# EAGLE board aurdino 17 (EAGLE 9.7.0)

Size 171.56 x 59.69 mm. Coordinates in mm from the lower left corner, seen from the top.
Outline: 0,0 171.56,0 171.56,59.69 0,59.69 0,0
Copper layers (1*16): Top 0.035mm / dielectric 1.5mm / Bottom 0.035mm
Design rules "default": minimum track width 6mil, minimum drill 0.35mm, track to track 6mil, track to pad 6mil, pad to pad 6mil, via to via 6mil, smd to smd 6mil, copper to edge 40mil, drill to drill 6mil, minimum pad ring 10mil, minimum via ring 8mil, stop-mask expansion 4mil, vias tented up to drill 0mil, thermal gap 10mil

## Footprints (pad centres in the part's own frame; a part is rotated, then mirrored left to right if it is on the bottom)
LEDRD254W60D565H860B = drill 0.981 pad 1.581: 1 -1.27,0; 2 1.27,0
LEDRD254W60D565H860B_Y = drill 0.981 pad 1.581: 1 -1.27,0; 2 1.27,0
LEDRD254W60D565H860B_G = drill 0.981 pad 1.581: 1 -1.27,0; 2 1.27,0
RESAD1016W63L850D250B = drill 0.83 pad 1.43: 1 -5.08,0; 2 5.08,0
HA-06-SM065 = drill 1 pad 1.676: 1 -2.54,-2.54; 2 0,2.54; 3 2.54,-2.54
ARDUINO-UNO-R3-SHIELD = drill 1.016 pad 1.88: 3.3V 24.13,-2.54; 5V 24.13,0; A0 24.13,12.7; A1 24.13,15.24; A2 24.13,17.78; A3 24.13,20.32; A4 24.13,22.86; A5 24.13,25.4; AREF -24.13,-13.97; D2 -24.13,20.32; D3 -24.13,17.78; D4 -24.13,15.24; D5 -24.13,12.7; D6 -24.13,10.16; D7 -24.13,7.62; D8 -24.13,3.81; D9 -24.13,1.27; D10 -24.13,-1.27; D11 -24.13,-3.81; D12 -24.13,-6.35; D13 -24.13,-8.89; GND@0 24.13,2.54; GND@1 24.13,5.08; GND@2 -24.13,-11.43; IOREF 24.13,-7.62; NC 24.13,-10.16; RES 24.13,-5.08; RX -24.13,25.4; SCL -24.13,-19.05; SDA -24.13,-16.51; TX -24.13,22.86; VIN 24.13,7.62

## Placement (x,y rotation side)
D6  RED  [LEDRD254W60D565H860B]  130.22,46.43 180 top
D7  YELLOW  [LEDRD254W60D565H860B_Y]  135.3,46.43 180 top
D8  YELLOW  [LEDRD254W60D565H860B_Y]  140.38,46.43 180 top
D9  GREEN  [LEDRD254W60D565H860B_G]  145.46,46.43 180 top
D10  GREEN  [LEDRD254W60D565H860B_G]  150.54,46.43 180 top
R6  450  [RESAD1016W63L850D250B]  151.81,31.19 90 top
R7  450  [RESAD1016W63L850D250B]  146.73,31.19 90 top
R8  450  [RESAD1016W63L850D250B]  141.65,31.19 90 top
R9  450  [RESAD1016W63L850D250B]  136.57,31.19 90 top
R10  450  [RESAD1016W63L850D250B]  131.49,31.19 90 top
RPOT2  250k  [HA-06-SM065]  164.51,21.03 0 top
U2  ARDUINO-UNO-R3-SHIELD  [ARDUINO-UNO-R3-SHIELD]  47.88,29.84 270 top

## Library data of the parts
D6 = Tinkercad; CATEGORY: Opto-Electronic; SUB-CATEGORY: LED; VALUE: LED_RED
D7 D8 = Tinkercad; CATEGORY: Opto-Electronic; SUB-CATEGORY: LED; VALUE: LED_YELLOW
D9 D10 = Tinkercad; CATEGORY: Opto-Electronic; SUB-CATEGORY: LED; VALUE: LED_GREEN
R6-R10 RPOT2 U2 = Tinkercad

## Nets
D6_A: D6.1 R10.2
D7_A: D7.1 R9.2
D8_A: D8.1 R8.2
D9_A: D9.1 R7.2
D10_A: D10.1 R6.2
U2_5V: R6.1 R7.1 R8.1 R9.1 R10.1 RPOT2.3 U2.5V
U2_A0: RPOT2.2 U2.A0
U2_D2: D10.2 U2.D2
U2_D3: D9.2 U2.D3
U2_D4: D8.2 U2.D4
U2_D5: D7.2 U2.D5
U2_D6: D6.2 U2.D6
U2_GND: RPOT2.1 U2.GND@0 U2.GND@1 U2.GND@2

## Tracks (layer width: path | path; a pad name or v marks a point on that pad's centre or on a via)
D6_A  (1 unrouted)
D7_A  (1 unrouted)
D8_A  (1 unrouted)
D9_A  (1 unrouted)
D10_A  (1 unrouted)
U2_5V  (6 unrouted)
U2_A0  (1 unrouted)
U2_D2  (1 unrouted)
U2_D3  (1 unrouted)
U2_D4  (1 unrouted)
U2_D5  (1 unrouted)
U2_D6  (1 unrouted)
U2_GND  (3 unrouted)